# Altium PCB PCB_液晶模块-1.8寸-Z180SN009_2023-02-27.pcbdoc
Units mil, origin at the board's own origin, x right, y up, seen from the top; angles counter-clockwise.
Board outline 3636.64 x 2683.96 mil, 2 copper layers (Top Layer, Bottom Layer); 17 components, 18 nets, 36 pads, 9 vias.
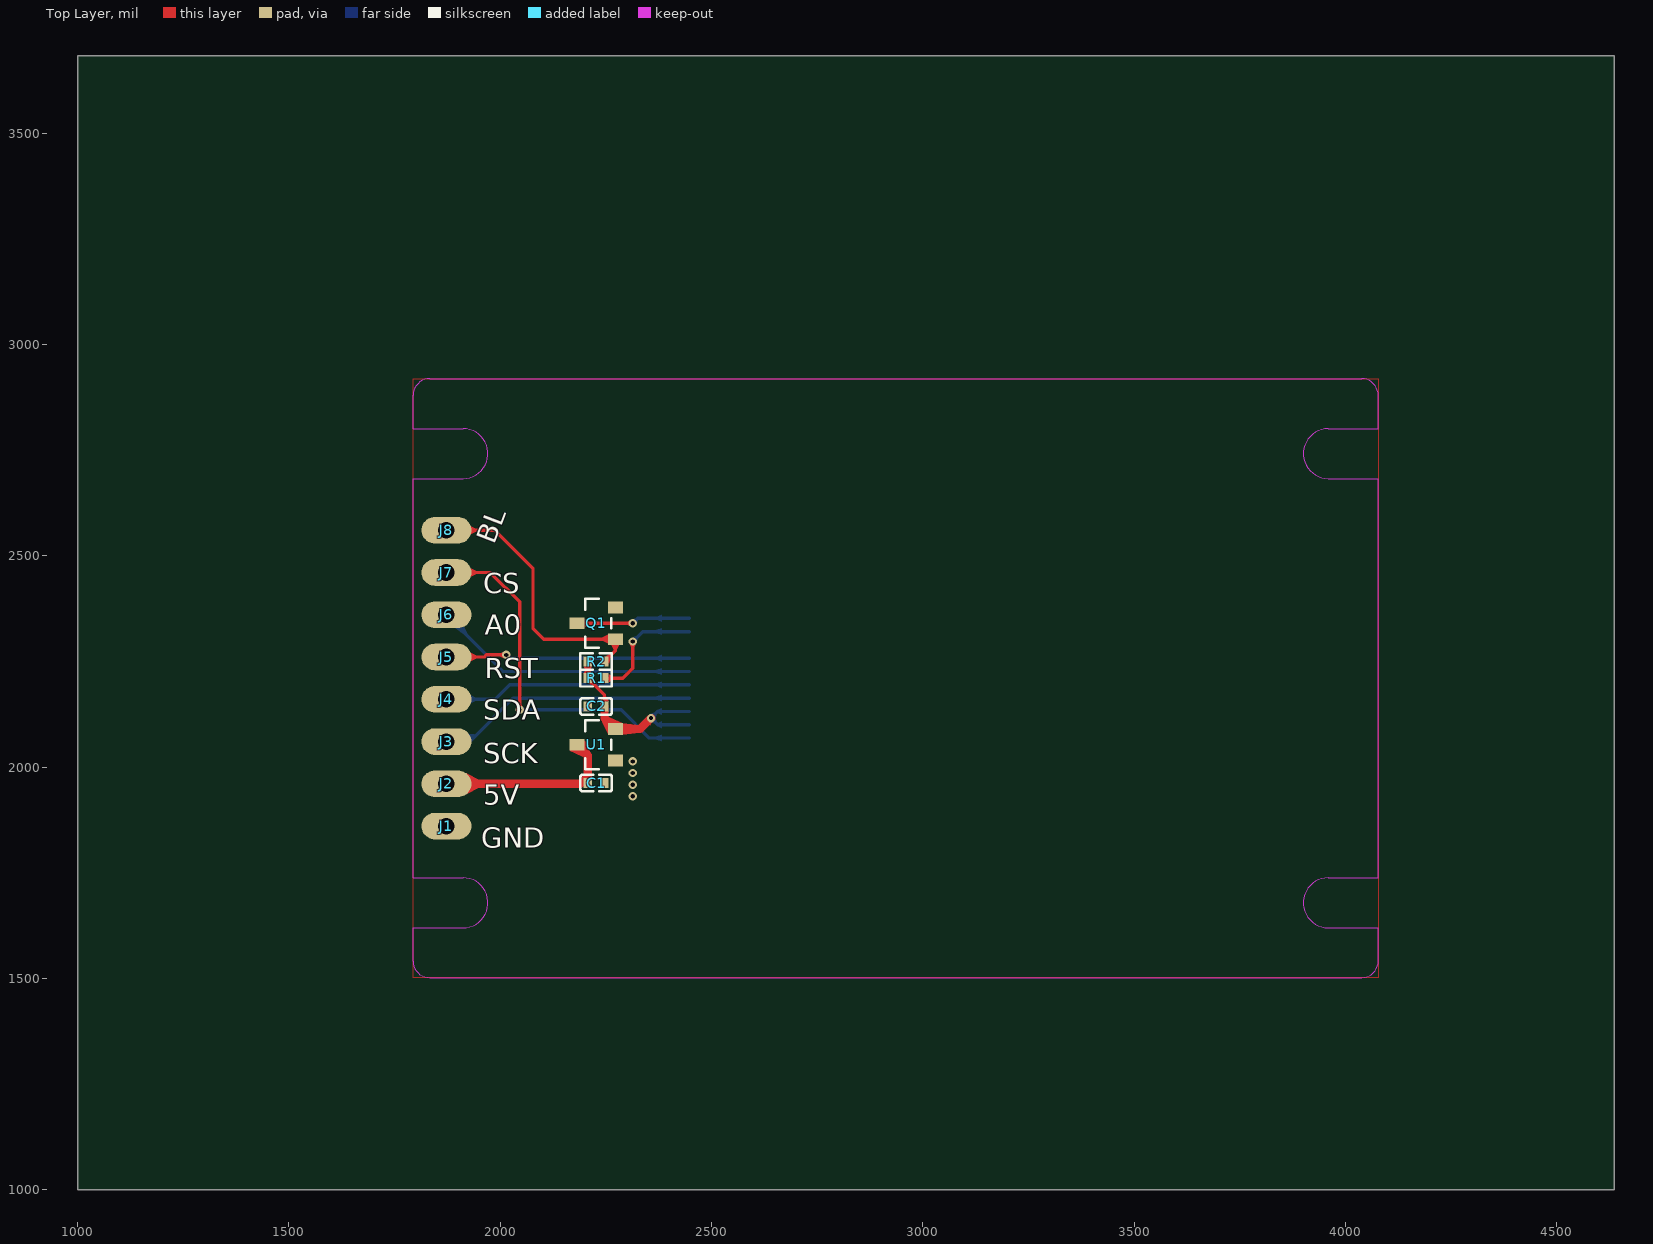
[diagram p0: Top Layer view]
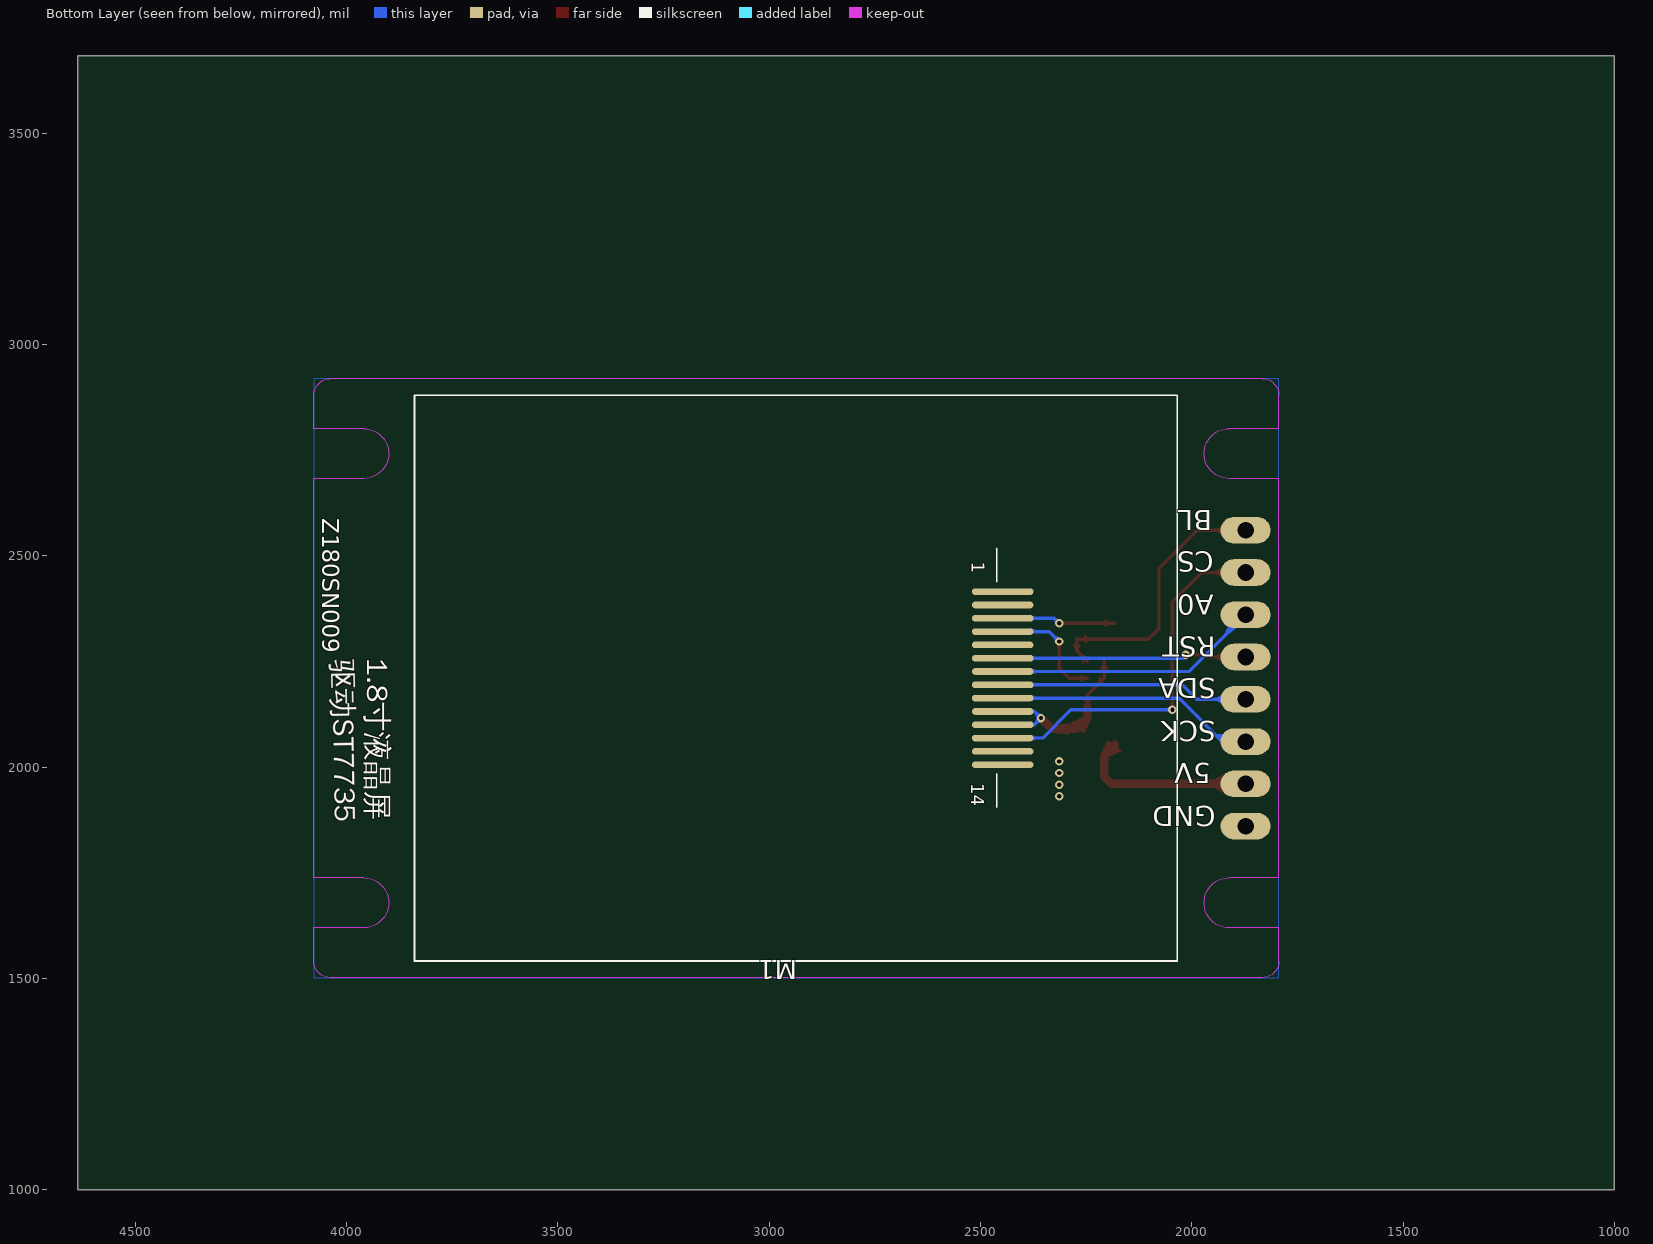
[diagram p1: Bottom Layer view, seen from below]

## Layer stack, top to bottom
Top Solder: solder mask 0.4, Solder Resist, Dk 3.5
Top Layer: signal copper 1.4
Dielectric1: dielectric 12.6, FR-4, Dk 4.8
Bottom Layer: signal copper 1.4
Bottom Solder: solder mask 0.4, Solder Resist, Dk 3.5

## Board outline
4636.64,1000 1000,1000 1000,3683.96 4636.64,3683.96

## Design rules (kind name [scope] priority, off if disabled: settings)
Clearance [All] p1: gap=10 ignorepadtopadclearanceinfootprint=FALSE except(0: Arc-Hole Track-Hole SMDPad-Hole THPad-Hole Via-Hole Fill-Hole Poly-Hole Region-Hole Text-Hole)
PolygonConnect [All] p1: connectstyle=Relief reliefconductorwidth=10 reliefentries=4 polygonreliefangle="90 Angle" airgapwidth=10
RoutingVias [All] p1: holewidth=28 width=50 viastyle="Through Hole" minholewidth=28 minwidth=50 maxholewidth=28 maxwidth=50
SolderMaskExpansion [All] p1: expansion=4 istentingtop=FALSE
Width [All] p1: maxlimit=10 minlimit=10 preferedwidth=10
30 further rules are at their usual default settings.

## Components (designator, comment, footprint, x,y, rotation, side; value= is the part's Value field where it differs from the comment)
C1 "0.1u" C0402 2227.2,1962.63 r180 top
C2 "0.1u" C0402 2227.2,2143.73 r0 top
J1 "GND" PIN-1S 1872.87,1860.66 r180 top
J2 "5V" PIN-1S 1872.87,1960.66 r180 top
J3 "SCK" PIN-1S 1872.87,2060.66 r180 top
J4 "SDA" PIN-1S 1872.87,2160.66 r180 top
J5 "RST" PIN-1S 1872.87,2260.66 r180 top
J6 "A0" PIN-1S 1872.87,2360.66 r180 top
J7 "CS" PIN-1S 1872.87,2460.66 r180 top
J8 "BL" PIN-1S 1872.87,2560.66 r180 top
M1 "1.77_Z180SN009" 1.77_Z180SN009 2963.43,2210.66 r180 bottom
Q1 "AO3400A" SOT-23-3_L2.9-W1.3-P1.90-LS2.4-BR 2227.2,2340.58 r0 top
R1 "100R" R0402 2227.2,2210.66 r0 top
R2 "10k" R0402 2227.2,2250.03 r180 top
U1 "SE8533-LF" SOT-23-3_L2.9-W1.3-P1.90-LS2.4-BR 2227.2,2053.18 r0 top
? "" ? 1648.07,2210.66 r0 top
? "" ? 2935.87,3050.64 r0 top

## Footprints (in the part's own frame and the unit in brackets; to place one, negate y for a bottom-side part, rotate by r counter-clockwise, add the part's x,y. Pads: shape width x height; smd on the part's side, far side on the other; paste and mask are expansions set on the pad)
1.77_Z180SN009 [mm]
  oval 3.7x0.4 smd: 1(13.1,5.2) 2(13.1,4.4) 3(13.1,3.6) 4(13.1,2.8) 5(13.1,2) 6(13.1,1.2) 7(13.1,0.4) 8(13.1,-0.4) 9(13.1,-1.2) 10(13.1,-2) 11(13.1,-2.8) 12(13.1,-3.6) 13(13.1,-4.4) 14(13.1,-5.2)
  silkscreen extent -22.25,-17 23.6,17
C0402 [mm]
  rect 0.5x0.6 smd: 1(-0.5,0) 2(0.5,0)
  silkscreen extent -0.95,-0.5 0.95,0.5
PIN-1S [mm]
  oval 3x1.6 hole 1: 1(0,0)
R0402 [mm]
  rect 0.5x0.6 smd: 1(-0.5,0) 2(0.5,0)
  silkscreen extent -0.95,-0.5 0.95,0.5
SOT-23-3_L2.9-W1.3-P1.90-LS2.4-BR [mm]
  rect 0.9x0.7 smd: 1(1.15,-0.95) 2(1.15,0.95) 3(-1.15,0)
  silkscreen extent -0.65,-1.46 0.9,1.46
? [mil]

## Via types
v1: diameter 19.69, hole 10, Top Layer to Bottom Layer, 9 vias

## Nets (pads, with @x,y where several pads share a name; then routed paths per layer and width w, separated by ;. In a path a pad name is that pad's centre, name@x,y a point inside that pad or via, vN(x,y) a via of type N, cw(c..) or ccw(c..) an arc to the next point about the centre after c; other vN are vias at no path point)
+5V: C1.2 J2.1 U1.3 | length 427.3
  Top Layer w19.68: J2.1 2189.77,1960.66 2207.47,1978.36 2207.47,2027.56 U1.3@2181.97,2053.16
A0: J6.1 M1.7 | length 630.4
  Bottom Layer w7.87: J6.1 2007.17,2226.36 M1.7
BL: J8.1 Q1.1 R2.1 | length 652.8
  Top Layer w7.87: J8.1 1986.67,2560.66 2077.57,2470.46 2077.57,2328.76 2103.17,2303.16 Q1.1 2272.47,2275.66 R2.1@2246.87,2250.06
CS: J7.1 M1.12 | length 887
  Top Layer w7.87: J7.1 1977.17,2460.66 2046.07,2391.76 v1(2046.1,2135.86)
  Bottom Layer w7.87: v1(2046.1,2135.86) 2286.27,2135.86 2353.17,2068.96 M1.12@2447.67,2068.96
GND: C1.1 C2.1 J1.1 M1.2 M1.5 M1.13 Q1.2 U1.1
  other v1: 2313.82,1931.13 2313.82,1958.69 2313.82,1986.25 2313.82,2013.81
M1_3: M1.3 Q1.3 | length 270.6
  Top Layer w7.87: Q1.3@2181.97,2340.56 v1(2313.82,2340.58)
  Bottom Layer w7.87: v1(2313.82,2340.58) 2325.67,2352.36 M1.3
M1_4: M1.4 R1.2 | length 283.3
  Top Layer w7.87: R1.2 2290.17,2210.66 2305.97,2226.36 2313.77,2234.26 v1(2313.82,2297.27)
  Bottom Layer w7.87: v1(2313.82,2297.27) 2337.47,2320.86 M1.4
RESET: J5.1 M1.6 | length 580.1
  Top Layer w7.87: J5.1 1962.27,2260.66 1967.37,2265.76 v1(2014.6,2265.78)
  Bottom Layer w7.87: v1(2014.6,2265.78) 2022.47,2257.96 M1.6@2447.67,2257.96
S$595: 
S$597: 
S$601: 
S$605: 
S$607: 
S$610: 
S$612: 
SCK: J3.1 M1.9 | length 617.4
  Bottom Layer w7.87: J3.1 1927.57,2060.66 2030.37,2163.46 M1.9@2447.67,2163.46
SDA: J4.1 M1.8 | length 589
  Bottom Layer w7.87: J4.1 1988.27,2160.66 2022.57,2194.96 M1.8@2447.67,2194.96
VCC: C2.2 M1.10 M1.11 R1.1 R2.2 U1.2 | length 475.8
  Top Layer w7.87: R2.2@2207.47,2250.06 R1.1 2246.87,2171.26 C2.2@2246.87,2143.76
  Top Layer w19.68: C2.2@2246.87,2143.76 2246.87,2116.16 U1.2 2331.47,2090.56 v1@2357.17,2116.16
  Bottom Layer w7.87: M1.11@2447.67,2100.46 2372.87,2100.46 2357.17,2116.16 2372.87,2131.96 M1.10@2447.67,2131.96
  other v1: 2357.12,2116.17
pads on no net: M1.1 M1.14

## Polygon pours and split planes (outlines as drawn)
GND on Bottom Layer "Bottom Layer-GND" (solid, pour order 0): 1794.13,2919.32 4077.6,2919.32 4077.6,1502 1794.13,1502
GND on Top Layer "Top Layer-GND" (solid, pour order 1): 1794.13,2919.32 4077.6,2919.32 4077.6,1502 1794.13,1502

## Keep-outs
Keep-Out Layer:
  lines w2.01: 1794.13,1541.36 ccw(c1833.5,1541.36) 1833.5,1501.99 ; 1794.13,2879.95 cw(c1833.5,2879.95) 1833.5,2919.32 ; 1912.24,1620.11 ccw(c1912.24,1679.17) 1912.24,1738.22 ; 1912.24,2683.1 ccw(c1912.24,2742.16) 1912.24,2801.22 ; 3959.49,1620.11 cw(c3959.49,1679.16) 3959.49,1738.22 ; 3959.49,2683.1 cw(c3959.49,2742.16) 3959.49,2801.21 ; 4038.23,1502 ccw(c4038.23,1541.37) 4077.6,1541.37 ; 4038.23,2919.33 cw(c4038.23,2879.96) 4077.6,2879.96

## Other copper
Top Layer:
  region net BL: 1930.35,2550.82 1930.35,2570.5 1942.16,2564.6 1942.16,2556.72
  region net CS: 1930.35,2450.82 1930.35,2470.5 1942.16,2464.6 1942.16,2456.72
  region net RESET: 1930.35,2250.82 1930.35,2270.5 1942.16,2264.6 1942.16,2256.72
  region net +5V: 1920.09,1936.06 1920.09,1985.27 1949.62,1970.5 1949.62,1950.82
  region net VCC: 2254.76,2080.27 2290.2,2104.36 2258.46,2118.49 2241.89,2107.22
  region net VCC: 2290.2,2104.36 2290.2,2076.8 2319.73,2080.72 2319.73,2100.4
  region net +5V: 2199.65,2063.38 2164.21,2039.4 2195.92,2025.21 2212.52,2036.44
  region net BL: 2248.11,2261.84 2256.73,2244.15 2262.22,2259.84 2258.57,2267.33
  region net VCC: 2217.32,2238.22 2197.68,2238.22 2203.54,2226.41 2211.41,2226.41
  region net VCC: 2197.67,2222.48 2217.32,2222.48 2211.41,2234.29 2203.54,2234.29
  region net VCC: 2217.36,2216.55 2208.75,2198.85 2219.21,2193.36 2222.85,2200.85
  region net M1_4: 2256.73,2220.5 2256.73,2200.82 2268.54,2206.72 2268.54,2214.6
  region net VCC: 2237.05,2155.54 2256.72,2155.54 2250.81,2167.36 2242.94,2167.36
  region net BL: 2282.32,2289.4 2262.63,2289.4 2268.54,2277.59 2276.41,2277.59
  region net BL: 2254.76,2293.32 2254.76,2313 2242.95,2307.1 2242.95,2299.22
  region net M1_3: 2199.65,2350.4 2199.65,2330.72 2211.46,2336.62 2211.46,2344.5
  region net M1_3: 2307.32,2333.19 2307.3,2347.95 2300.42,2344.5 2300.43,2336.62
  region net M1_4: 2321.18,2290.73 2306.42,2290.79 2309.84,2283.88 2317.71,2283.86
  region net CS: 2053.49,2142.37 2038.72,2142.37 2042.17,2149.26 2050.04,2149.26
  region net RESET: 2008.11,2258.39 2008.08,2273.15 2001.2,2269.7 2001.21,2261.83
  region net VCC: 2357.74,2106.35 2347.3,2116.79 2340.69,2113.66 2354.61,2099.74
Bottom Layer:
  region net A0: 1913.97,2332.23 1894.53,2329.17 1910.61,2317.36 1921.75,2317.36
  region net SDA: 1930.35,2150.82 1930.35,2170.5 1942.16,2164.6 1942.16,2156.72
  region net SCK: 1931.93,2060.34 1925.97,2079.1 1938.86,2077.52 1941.55,2069.07
  region net CS: 2382.72,2061.06 2382.72,2076.81 2370.91,2072.87 2370.91,2064.99
  region net SCK: 2382.75,2171.3 2382.69,2155.55 2370.89,2159.53 2370.92,2167.4
  region net M1_3: 2382.72,2344.53 2382.72,2360.28 2370.91,2356.34 2370.91,2348.47
  region net RESET: 2382.72,2250.04 2382.72,2265.79 2370.91,2261.85 2370.91,2253.98
  region net M1_4: 2382.72,2313.03 2382.72,2328.78 2370.91,2324.84 2370.91,2316.96
  region net A0: 2382.72,2218.54 2382.71,2234.29 2370.9,2230.34 2370.91,2222.46
  region net VCC: 2382.72,2092.56 2382.72,2108.31 2372.87,2104.37 2372.87,2096.5
  region net VCC: 2382.72,2124.05 2382.72,2139.8 2372.87,2135.86 2372.87,2127.98
  region net SDA: 2382.72,2187.05 2382.72,2202.8 2370.91,2198.86 2370.91,2190.99
  region net M1_3: 2323.65,2339.97 2313.21,2350.41 2320.52,2352.84 2326.08,2347.27
  region net M1_4: 2323.65,2296.65 2313.21,2307.09 2320.52,2309.53 2326.08,2303.96
  region net CS: 2052.61,2128.48 2052.61,2143.24 2059.5,2139.8 2059.5,2131.93
  region net RESET: 2024.43,2266.4 2013.99,2255.96 2019.69,2255.13 2025.26,2260.7
  region net VCC: 2366.95,2115.56 2356.51,2126 2363.82,2128.43 2369.39,2122.87
  region net VCC: 2366.95,2116.79 2356.51,2106.35 2363.82,2103.92 2369.39,2109.48

## Silkscreen, mask and mechanical layers (free items; w line width, h text height)
Top Overlay:
  text "BL" at 1985.48,2525.03 h47.24 r69
  text "CS" at 1959.48,2411.45 h47.24
  text "A0" at 1963.42,2313.02 h47.24
  text "RST" at 1963.42,2210.66 h47.24
  text "SDA" at 1959.48,2112.24 h47.24
  text "SCK" at 1959.48,2009.87 h47.24
  text "5V" at 1959.48,1911.45 h47.24
  text "GND" at 1955.55,1809.09 h47.24
Bottom Overlay:
  text "BL" at 1951.61,2608.3 h47.24 r180
  text "Z180SN009" at 4057.92,2588.61 h39.37 r90
  text "CS" at 1947.67,2509.87 h47.24 r180
  text "A0" at 1947.67,2407.51 h47.24 r180
  text "RST" at 1943.74,2309.08 h47.24 r180
  text "1.8寸液晶屏" at 3967.36,2257.9 h86.61 r90
  text "驱动ST7735" at 4050.04,2253.97 h86.61 r89
  text "SDA" at 1943.74,2210.66 h47.24 r180
  text "SCK" at 1943.74,2108.3 h47.24 r180
  text "5V" at 1955.55,2009.87 h47.24 r180
  text "GND" at 1943.74,1907.51 h47.24 r180

## Text inside footprints (layer, text, board x,y; h text height)
M1: Bottom Overlay "1" at 2520.5,2486.26 h31.5 r90; Bottom Overlay "14" at 2522.48,1962.63 h31.5 r90